# Altium PCB USB_EMMC.PcbDoc
Units mil, origin at the board's own origin, x right, y up, seen from the top; angles counter-clockwise.
Board outline 2260.62 x 862.34 mil, 2 copper layers (Top Layer, Bottom Layer); 54 components, 41 nets, 292 pads, 197 vias.
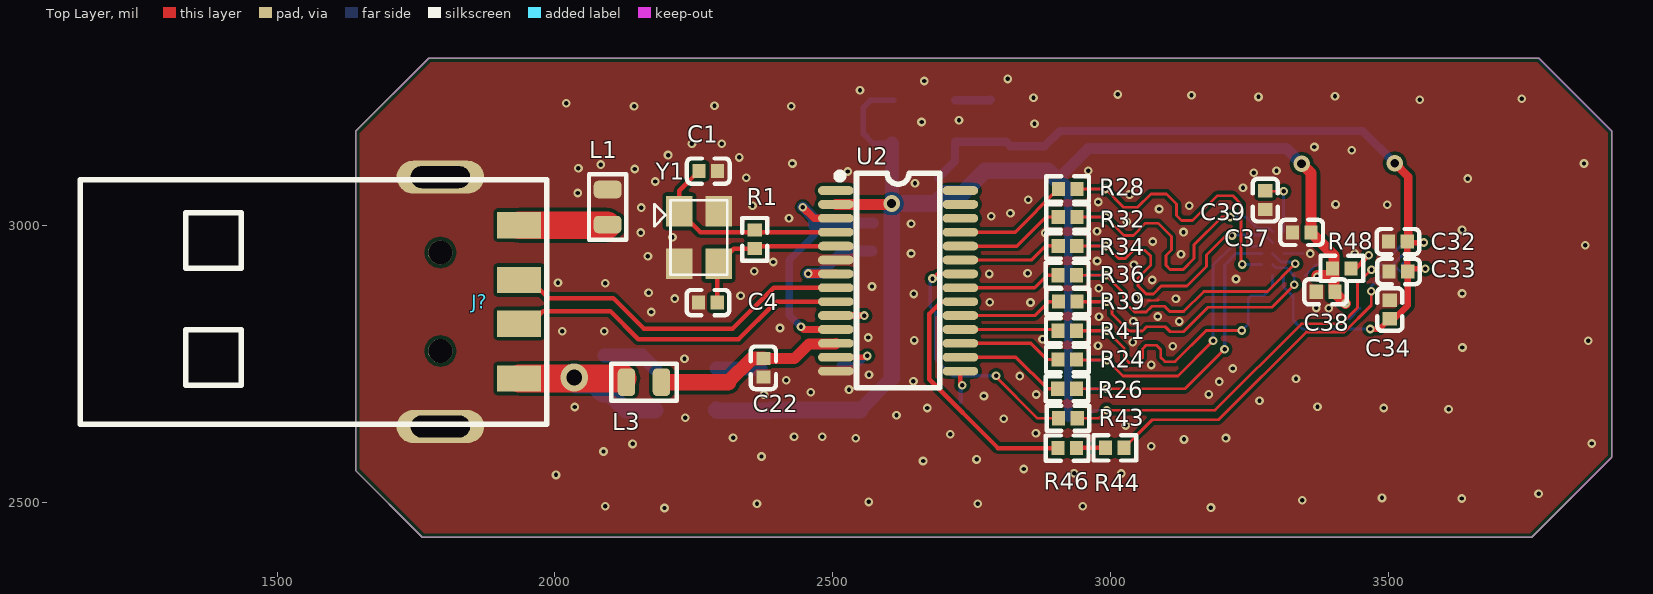
[diagram p0: Top Layer view]
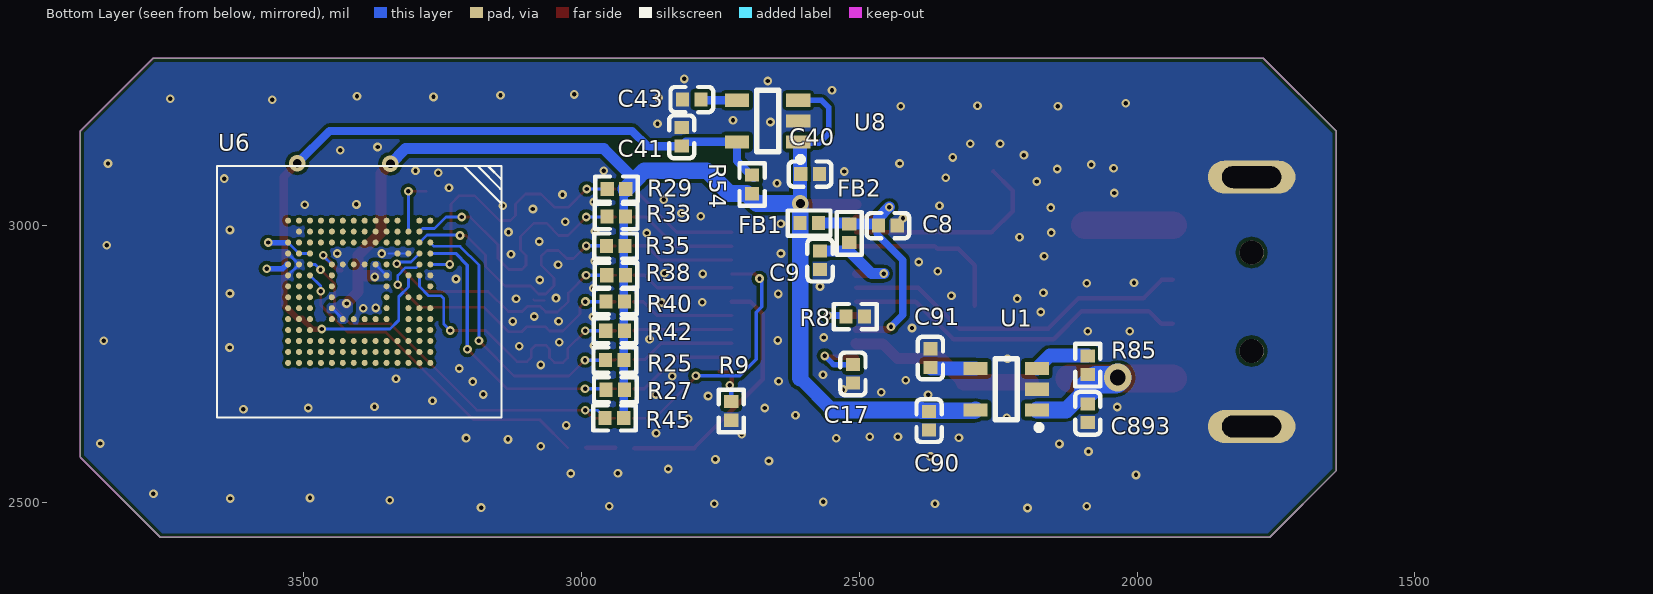
[diagram p1: Bottom Layer view, seen from below]
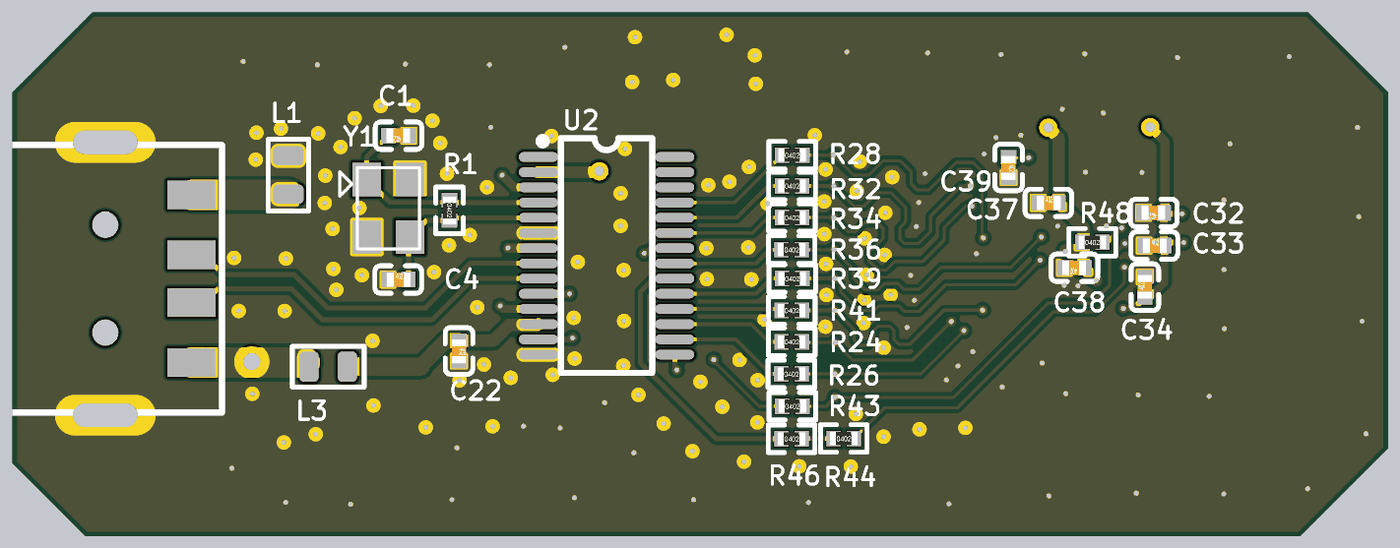
[diagram p2: 3D render of the assembled board from above, using the file's embedded part models]
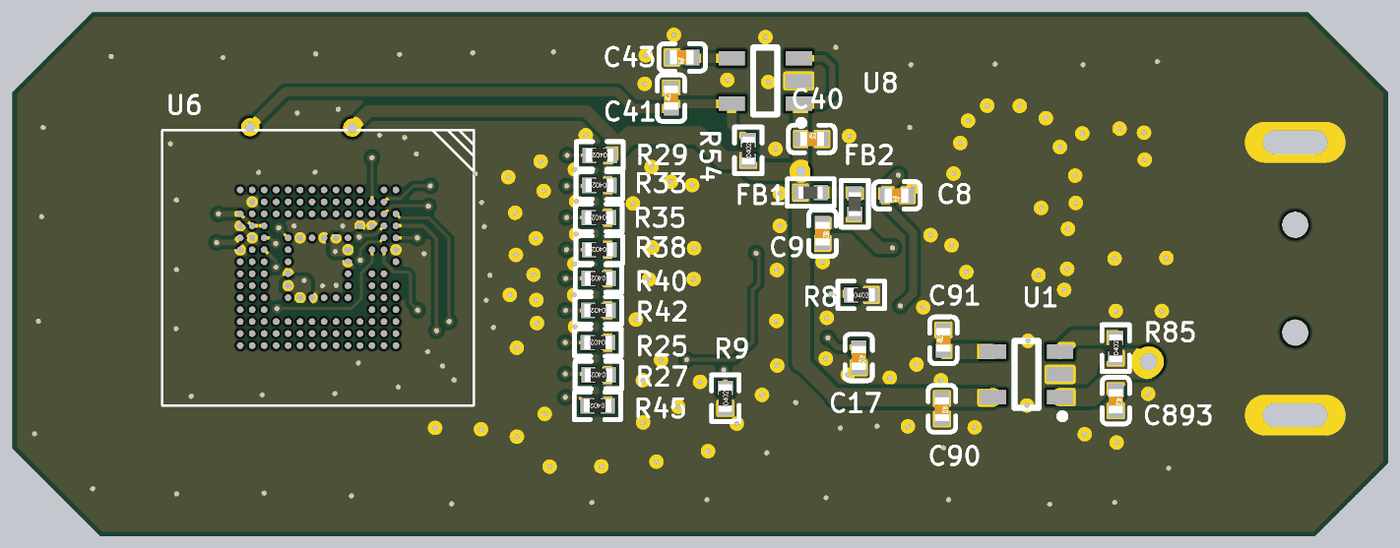
[diagram p3: 3D render of the assembled board from below, using the file's embedded part models]

## Layer stack, top to bottom
Top Solder: solder mask 0.4, Solder Resist, Dk 3.5
Top Layer: signal copper 1.4
Dielectric 1: dielectric 12.6, FR-4, Dk 4.8
Bottom Layer: signal copper 1.4
Bottom Solder: solder mask 0.4, Solder Resist, Dk 3.5

## Board outline
1761.45,2438.08 1641.33,2558.2 1641.33,3168.78 1772.97,3300.42 3770.48,3300.42 3901.95,3168.95 3901.95,2582.39 3757.64,2438.08

## Design rules (kind name [scope] priority, off if disabled: settings)
Clearance Clearance_1 [InComponent('U6')] p1: gap=5 ignorepadtopadclearanceinfootprint=FALSE
Clearance [All] p2: gap=6 ignorepadtopadclearanceinfootprint=FALSE
ComponentClearance [All] p1: gap=0 collisioncheckmode=3 verticalgap=0 showdistances=FALSE
HoleToHoleClearance [All] p1: gap=0 allowstackedmicrovias=TRUE
MinimumSolderMaskSliver [All] p1: minsoldermaskwidth=0
PlaneConnect [All] p1: planeconnectstyle=Direct reliefexpansion=20 reliefentries=4 reliefconductorwidth=10 reliefairgap=10
PolygonConnect [All] p1: connectstyle=Direct reliefconductorwidth=10 reliefentries=4 polygonreliefangle="90 Angle" airgapwidth=10
RoutingVias [All] p1: holewidth=7.87 width=15.75 viastyle="Through Hole" minholewidth=7.87 minwidth=15.75 maxholewidth=1181.1 maxwidth=1574.8
SilkToSilkClearance [All] p1: silktosilkclearance=0
SilkToSolderMaskClearance [IsPad] p1: minsilkscreentomaskgap=0 clearancetoexposedcopper=TRUE
SolderMaskExpansion [All] p1: expansion=4
Width [All] p1: maxlimit=100 minlimit=4 preferedwidth=8
24 further rules are at their usual default settings.

## Components (designator, comment, footprint, x,y, rotation, side; value= is the part's Value field where it differs from the comment)
C1 "22pF/50V" 0402_C 2275.92,3097.14 r180 top
C4 "22pF/50V" 0402_C 2275.31,2860.56 r0 top
C8 "100nF/16V" 0402_C 2448.38,2998.95 r0 bottom
C9 "4.7uF/10V" 0402_C 2570.56,2936.72 r270 bottom
C17 "100nF/50V" 0402_C 2511.25,2732.22 r270 bottom
C22 "10uF/10V" 0402_C 2375.15,2743.16 r270 top
C32 "10uF/10V" 0402_C 3516.89,2970.22 r180 top
C33 "1uF/16V" 0402_C 3517.88,2916.38 r0 top
C34 "100nF/16V" 0402_C 3502.3,2848.01 r90 top
C37 "1uF/16V" 0402_C 3343.74,2986.65 r0 top
C38 "100nF/16V" 0402_C 3386.7,2879.92 r180 top
C39 "100nF/16V" 0402_C 3278.34,3044.88 r270 top
C40 "1uF/10V" 0402_C 2588.47,3091.74 r180 bottom
C41 "1uF/10V" 0402_C 2819.48,3158.79 r90 bottom
C43 "10nF/50V" 0402_C 2801.24,3225.83 r0 bottom
C90 "1uF/10V" 0402_C 2374.4,2648.02 r270 bottom
C91 "10nF/50V" 0402_C 2371.95,2760.61 r90 bottom
C893 "1uF/10V" 0402_C 2088.68,2661.32 r270 bottom
FB1 "FB 120 Ohm" 0402_L 2590.04,3003.62 r0 bottom
FB2 "FB 120 Ohm" 0402_L 2517.74,2985.18 r270 bottom
J? "USB-A" USB-2.0-4P-18.8X12.0-H4.5-XKB 1864.74,2861.89 r270 top
L1 "100M@120R" 0805 2094.83,3032.47 r90 top
L3 "100M@120R" 0805 2160.27,2717.24 r180 top
R1 "1M/1%" 0402_R 2359.71,2974.27 r270 top
R8 "680R/1%" 0402_R 2507.13,2835.3 r180 bottom
R9 "0Ω/±1%" 0402_R 2730.35,2665.49 r90 bottom
R24 "27Ω/±1%" 0402_R 2922,2758.08 r0 top
R25 "10KΩ/±1%" 0402_R 2939.79,2756.94 r0 bottom
R26 "27Ω/±1%" 0402_R 2921.5,2705.35 r0 top
R27 "10KΩ/±1%" 0402_R 2938.87,2703.57 r0 bottom
R28 "27Ω/±1%" 0402_R 2922.71,3064.98 r0 top
R29 "10KΩ/±1%" 0402_R 2936.73,3064.77 r0 bottom
R32 "27Ω/±1%" 0402_R 2922.48,3014.49 r0 top
R33 "10KΩ/±1%" 0402_R 2937.37,3015.45 r0 bottom
R34 "27Ω/±1%" 0402_R 2922.36,2962.5 r0 top
R35 "10KΩ/±1%" 0402_R 2938.18,2962.17 r0 bottom
R36 "27Ω/±1%" 0402_R 2921.78,2909.62 r0 top
R38 "10KΩ/±1%" 0402_R 2937.54,2909.66 r0 bottom
R39 "27Ω/±1%" 0402_R 2922.83,2862.24 r0 top
R40 "10KΩ/±1%" 0402_R 2938.82,2862.25 r0 bottom
R41 "27Ω/±1%" 0402_R 2922.02,2809.67 r0 top
R42 "10KΩ/±1%" 0402_R 2939.29,2809.76 r0 bottom
R43 "27Ω/±1%" 0402_R 2923.06,2652.24 r0 top
R44 "33Ω /1%" 0402_R 3007.56,2599.07 r0 top
R45 "10KΩ/±1%" 0402_R 2940.46,2653 r0 bottom
R46 "27Ω/±1%" 0402_R 2921.76,2598.72 r0 top
R48 "10KΩ/±1%" 0402_R 3415.99,2921.85 r0 top
R54 "NC" 0402_R 2692.67,3072.99 r90 bottom
R85 "10KΩ/±1%" 0402_R 2088.95,2747.83 r90 bottom
U1 "RT9167A-33GB" SOT-23-5 2235.56,2704.59 r180 bottom
U2 "GL827L-HHY02" SSOP-28_150MIL 2617.63,2899.63 r0 top locked
U6 "THGBMHG6C1LBAIL" "IC-BGA153-SDIN8DE1-8G-C - DUPLICATE" 3399.7,2879.93 r270 bottom locked
U8 "SGM2019-1.8YN5G/TR" SOT-23-5 2664.76,3187.11 r180 bottom
Y1 "12MHZ_3225" SMD_XTAL_3225 2259.23,2977.71 r270 top

## Footprints (in the part's own frame and the unit in brackets; to place one, negate y for a bottom-side part, rotate by r counter-clockwise, add the part's x,y. Pads: shape width x height; smd on the part's side, far side on the other; paste and mask are expansions set on the pad)
0402_C [mm]
  rect 0.6x0.65 smd mask+0.051: 1(-0.425,0) 2(0.425,0)
  silkscreen extent -0.97,-0.58 0.97,0.58, body extent -0.48,-0.3 0.52,0.3, height 0.2
0402_L [mm]
  rect 0.6x0.65 smd mask+0.051: 1(-0.425,0) 2(0.425,0)
  silkscreen extent -0.97,-0.58 0.97,0.58, body extent -0.49,-0.26 0.52,0.26, height 0.36
0402_R [mm]
  rect 0.6x0.65 smd mask+0.051: 1(-0.425,0) 2(0.425,0)
  silkscreen extent -0.97,-0.58 0.97,0.58, body extent -0.57,-0.27 0.58,0.28, height 0.41
0805 [mm]
  rrect50% 0.8x1.27 smd: 1(-0.8,0) 2(0.8,0)
  silkscreen extent -1.5,-0.85 1.5,0.85
"IC-BGA153-SDIN8DE1-8G-C - DUPLICATE" [mm]
  round 0.275 smd: AA1(-3.25,-3.25) AA3(-2.25,-3.25) AA4(-1.75,-3.25) AA5(-1.25,-3.25) AA6(-0.75,-3.25) AA7(-0.25,-3.25) AA8(0.25,-3.25) AA9(0.75,-3.25) AA10(1.25,-3.25) AA11(1.75,-3.25) AA12(2.25,-3.25) AA13(2.75,-3.25) AA14(3.25,-3.25) H1(-3.25,3.25) H3(-2.25,3.25) H4(-1.75,3.25) H5(-1.25,3.25) H6(-0.75,3.25) H7(-0.25,3.25) H9(0.75,3.25) H10(1.25,3.25) H11(1.75,3.25) H12(2.25,3.25) H13(2.75,3.25) H14(3.25,3.25) J1(-3.25,2.75) J2(-2.75,2.75) J3(-2.25,2.75) J4(-1.75,2.75) J5(-1.25,2.75) J6(-0.75,2.75) J8(0.25,2.75) J9(0.75,2.75) J10(1.25,2.75) J11(1.75,2.75) J12(2.25,2.75) J13(2.75,2.75) J14(3.25,2.75) K2(-2.75,2.25) K3(-2.25,2.25) K4(-1.75,2.25) K6(-0.75,2.25) K8(0.25,2.25) K9(0.75,2.25) K10(1.25,2.25) K11(1.75,2.25) K12(2.25,2.25) K13(2.75,2.25) K14(3.25,2.25) L1(-3.25,1.75) L2(-2.75,1.75) L3(-2.25,1.75) L4(-1.75,1.75) L12(2.25,1.75) L13(2.75,1.75) L14(3.25,1.75) M1(-3.25,1.25) M2(-2.75,1.25) M3(-2.25,1.25) M5(-1.25,1.25) M6(-0.75,1.25) M7(-0.25,1.25) M8(0.25,1.25) M9(0.75,1.25) M10(1.25,1.25) M12(2.25,1.25) M13(2.75,1.25) M14(3.25,1.25) N1(-3.25,0.75) N2(-2.75,0.75) N3(-2.25,0.75) N5(-1.25,0.75) N10(1.25,0.75) N12(2.25,0.75) N13(2.75,0.75) N14(3.25,0.75) P1(-3.25,0.25) P2(-2.75,0.25) P3(-2.25,0.25) P5(-1.25,0.25) P10(1.25,0.25) P12(2.25,0.25) P13(2.75,0.25) P14(3.25,0.25) R1(-3.25,-0.25) R2(-2.75,-0.25) R3(-2.25,-0.25) R5(-1.25,-0.25) R10(1.25,-0.25) R12(2.25,-0.25) R13(2.75,-0.25) R14(3.25,-0.25) T1(-3.25,-0.75) T2(-2.75,-0.75) T3(-2.25,-0.75) T5(-1.25,-0.75) T10(1.25,-0.75) T12(2.25,-0.75) T13(2.75,-0.75) T14(3.25,-0.75) U1(-3.25,-1.25) U2(-2.75,-1.25) U3(-2.25,-1.25) U5(-1.25,-1.25) U6(-0.75,-1.25) U7(-0.25,-1.25) U8(0.25,-1.25) U9(0.75,-1.25) U10(1.25,-1.25) U12(2.25,-1.25) U13(2.75,-1.25) U14(3.25,-1.25) V1(-3.25,-1.75) V2(-2.75,-1.75) V3(-2.25,-1.75) V12(2.25,-1.75) V13(2.75,-1.75) V14(3.25,-1.75) W1(-3.25,-2.25) W2(-2.75,-2.25) W3(-2.25,-2.25) W4(-1.75,-2.25) W5(-1.25,-2.25) W6(-0.75,-2.25) W7(-0.25,-2.25) W8(0.25,-2.25) W9(0.75,-2.25) W10(1.25,-2.25) W11(1.75,-2.25) W12(2.25,-2.25) W13(2.75,-2.25) W14(3.25,-2.25) Y1(-3.25,-2.75) Y2(-2.75,-2.75) Y3(-2.25,-2.75) Y4(-1.75,-2.75) Y5(-1.25,-2.75) Y6(-0.75,-2.75) Y7(-0.25,-2.75) Y8(0.25,-2.75) Y9(0.75,-2.75) Y10(1.25,-2.75) Y11(1.75,-2.75) Y12(2.25,-2.75) Y13(2.75,-2.75) Y14(3.25,-2.75)
  silkscreen extent -5.75,-6.5 5.75,6.5
SMD_XTAL_3225 [mm]
  rect 1.4x1.2 smd: 1(-1.2,-0.9) 2(1.2,-0.9) 3(1.2,0.9) 4(-1.2,0.9)
  silkscreen extent -1.7,-2.03 1.7,1.3
SOT-23-5 [mm]
  rect 1.1x0.6 smd: 1(1.4,-0.95) 2(1.4,0) 3(1.4,0.95) 4(-1.4,0.95) 5(-1.4,-0.95)
  silkscreen extent -0.5,-1.87 1.62,1.4
SSOP-28_150MIL [mil]
  oval 64.17x15.75 smd: 1(-112,162.5) 2(-112,137.5) 3(-112,112.5) 4(-112,87.5) 5(-112,62.5) 6(-112,37.5) 7(-112,12.5) 8(-112,-12.5) 9(-112,-37.5) 10(-112,-62.5) 11(-112,-87.5) 12(-112,-112.5) 13(-112,-137.5) 14(-112,-162.5) 15(112,-162.5) 16(112,-137.5) 17(112,-112.5) 18(112,-87.5) 19(112,-62.5) 20(112,-37.5) 21(112,-12.5) 22(112,12.5) 23(112,37.5) 24(112,62.5) 25(112,87.5) 26(112,112.5) 27(112,137.5) 28(112,162.5)
  silkscreen extent -111,-192 75,194
USB-2.0-4P-18.8X12.0-H4.5-XKB [mm]
  rect 1.2x2 smd: 1(3.5,1.8) 2(1,1.8) 3(-1,1.8) 4(-3.5,1.8)
  oval 1.5x4 hole 1 slot 2.7 at 90 deg: 5(-5.7,-1.8) 6(5.7,-1.8)
  round 1.1 hole 1.1 unplated: ""(-2.25,-1.8) ""(2.25,-1.8)
  silkscreen extent -5.59,-18.27 5.59,3.07

## Part data
C1 C4: library part C2, "22pF/50V;0402"
C8 C34 C38 C39: library part CAP, "100nF±10%/16V，X7R，MLCC，-55°C ~ 125°C，0402", 参考链接=https://item.szlcsc.com/78132.html
C9: library part CAP, "4.7uF±20%/10V，X5R，0402", 参考链接=https://item.szlcsc.com/313626.html
C17: library part CAP, "100nF/50V;X7R;0402;"
C22: library part CAP, "10uF/10V;X5R;0402;"
C32: library part C2, "10uF/10V;0402"
C33 C37: library part CAP, "1uF±10%/10V，X5R，0402", 参考链接=https://item.szlcsc.com/78133.html
C40 C41: library part CAP, "1uF/10V;X5R;10%;0402;"
C43 C91: library part CAP, "10nF/50V;X7R;0402;"
C90 C893: library part CAP, "1uF/10V;X5R;0402;"
FB1 FB2: library part INDUCTOR1, "FB120 Ohm/1%;0402;"
J?: library part CON6, "Connector", Part_Field_Name_1="Part Field 1", Part_Field_Name_2="Part Field 2", Part_Field_Name_3="Part Field 3", Part_Field_Name_4="Part Field 4", Part_Field_Name_5="Part Field 5", Part_Field_Name_6="Part Field 6", Part_Field_Name_7="Part Field 7", Part_Field_Name_8="Part Field 8", Part_Field_Name_9="Part Field 9", Part_Field_Name_10="Part Field 10", Part_Field_Name_11="Part Field 11", Part_Field_Name_12="Part Field 12", Part_Field_Name_13="Part Field 13", Part_Field_Name_14="Part Field 14"
L1 L3: library part L, Part_Field_Name_1="Part Field 1", Part_Field_Name_2="Part Field 2", Part_Field_Name_3="Part Field 3", Part_Field_Name_4="Part Field 4", Part_Field_Name_5="Part Field 5", Part_Field_Name_6="Part Field 6", Part_Field_Name_7="Part Field 7", Part_Field_Name_8="Part Field 8", Part_Field_Name_9="Part Field 9", Part_Field_Name_10="Part Field 10", Part_Field_Name_11="Part Field 11", Part_Field_Name_12="Part Field 12", Part_Field_Name_13="Part Field 13", Part_Field_Name_14="Part Field 14", Part_Field_Name_15="Part Field 15"
R1: library part R, "1M/1%;0402"
R8: library part RES1, "680R/1%;0402;"
R9 R24 R26 R28 R32 R34 R36 R39 R41 R43 R46: library part "0603 27Ω (27R0) 1%", "贴片电阻", Package=0603, SuppliersPartNumber=C25190, ComponentLink1Description=供应商链接, ComponentLink1URL=http://www.szlcsc.com/product/details_25933.html, Supplier=LC
R25 R27 R29 R33 R35 R38 R40 R42 R45 R48 R85: library part "0402 10KΩ (1002) 1%", "贴片电阻", Package=0402, SuppliersPartNumber=C25744, ComponentLink1Description=供应商链接, ComponentLink1URL=http://www.szlcsc.com/product/details_26487.html, Supplier=LC
R44 R54: library part "0402 33Ω (33R0) 1%", "贴片电阻", Package=0402, SuppliersPartNumber=C25105, ComponentLink1Description=供应商链接, ComponentLink1URL=http://www.szlcsc.com/product/details_25848.html, Supplier=LC
U1: library part RT9167, "RT9167A-33GB;SOT23-5;RICHTEK; LDO"
U2: BOM_Manufacturer="Genesys Logic", BOM_Manufacturer Part=GL827L-HHY02, BOM_Supplier=LCSC, BOM_Supplier Part=C161839, Contributor=LCSC, spicePre=U
U6: library part KLMAG4FE4B-B002_0, "KLM8G2FEJA-A002", PCB DECAL=IC-BGA169-SDIN8DE1-8G-C, Source_Path=Z:\003_NXP4330\002_HW\002_REFERENCE_BOARD\001_SCHEMATIC\001_DEVELOP\NXP4330_TABLET_REF_VER090_130401-1.DSN
U8: library part XC6219B182MR, "XC6219B182MR;SOT23-5;TOREX;"
Y1: "XTAL;12MHZ_3225;Crystals"

## Via types
v1: diameter 15.75, hole 7.87, Top Layer to Bottom Layer, tented both sides, 97 vias
v2: diameter 15.75, hole 7.87, Top Layer to Bottom Layer, 96 vias
v3: diameter 30, hole 16, Top Layer to Bottom Layer, 3 vias
v4: diameter 50, hole 28, Top Layer to Bottom Layer, 1 vias

## Nets (pads, with @x,y where several pads share a name; then routed paths per layer and width w, separated by ;. In a path a pad name is that pad's centre, name@x,y a point inside that pad or via, vN(x,y) a via of type N, cw(c..) or ccw(c..) an arc to the next point about the centre after c; other vN are vias at no path point)
D0: R24.1 U2.17 | length 187.7
  Top Layer w6: U2.17 2855.92,2787.13 2884.97,2758.08 R24.1
D1: R26.1 U2.16 | length 198.7
  Top Layer w6: U2.16 2829.65,2762.13 2886.43,2705.35 R26.1
D2: R28.1 U2.25 | length 208.6
  Top Layer w6: U2.25 2828.13,2987.13 R28.1
D3: R32.1 U2.24 | length 197.8
  Top Layer w6: U2.24 2831.45,2962.13 2883.81,3014.49 R32.1
D4: R34.1 U2.23 | length 186.5
  Top Layer w6: U2.23 2857.73,2937.13 2883.1,2962.5 R34.1
D5: R36.1 U2.21 | length 184.7
  Top Layer w6: U2.21 2863.05,2887.13 2885.54,2909.62 R36.1
D6: R39.1 U2.19 | length 186.9
  Top Layer w6: U2.19 2863.13,2837.13 2888.24,2862.24 R39.1
D7: R41.1 U2.18 | length 176.7
  Top Layer w6: U2.18 2902.83,2812.13 R41.1
DATA0: R24.2 R25.2 U6.H3 | length 561.5
  Top Layer w5: R24.2 2939.89,2756.93 v1(2993.37,2756.93) 3021.99,2728.31 3120.89,2728.31 v1(3184.33,2791.75)
  Bottom Layer w5: v1(3184.33,2791.75) 3184.33,2927.92 3218.11,2961.7 3264.93,2961.7 U6.H3
  Bottom Layer w6: R25.2 v1(2993.37,2756.93)
DATA1: R26.2 R27.2 U6.H4 | length 561.4
  Top Layer w5: R26.2 3133.93,2705.35 v1(3205.06,2776.48)
  Bottom Layer w6: R27.2 2957.39,2705.35 v1@2993.31,2705.35 ; v1(3205.06,2776.48) 3205.06,2927.68 3226.21,2948.83 U6.H4
  other v1: 2993.31,2705.34
DATA2: R28.2 R29.2 U6.H5 | length 557
  Top Layer w5: R28.2 v1(2990.48,3064.97) ; v1(2990.48,3064.97) 3023.42,3032.03 3048.43,3032.03 3072.39,3055.99 3100.15,3055.99 3118.31,3037.83 3118.31,3017.53 3127.76,3008.08 3147.25,3008.08 3192.01,3052.84 3219.75,3052.84 3234.62,3037.97 3234.62,2931.28 v1(3236.77,2929.14)
  Bottom Layer w5: v1(3236.77,2929.14) U6.H5
  Bottom Layer w6: R29.2 2953.68,3064.98 v1(2990.48,3064.97)
DATA3: R32.2 R33.2 U6.J2 | length 556.3
  Top Layer w5: v1(2991.02,3014.49) 3024.31,2981.2 3040.78,2981.2 3063.01,3003.43 3085.32,3003.43 3109.44,2979.31 3109.44,2955.31 3099.38,2945.25 3099.38,2927.57 3106.95,2920 3130.57,2920 3150.21,2939.64 3150.21,2964.64 3200.06,3014.49 v1(3215.26,3014.49)
  Top Layer w6: R32.2 v1(2991.02,3014.49)
  Bottom Layer w5: v1(3215.26,3014.49) 3243.6,3014.49 3264.3,2993.79 3285.84,2993.79 U6.J2
  Bottom Layer w6: R33.2 2955.06,3014.49 v1(2991.02,3014.49)
DATA4: R34.2 R35.2 U6.J3 | length 562.2
  Top Layer w5: R34.2 v1(2991.17,2962.49) 3014.08,2939.58 3026.36,2939.58 3041.02,2954.24 3061.91,2954.24 3072.31,2943.84 3072.31,2928.04 3049.11,2904.84 3049.11,2890.86 3064.04,2875.93 3076.8,2875.93 3091.13,2890.26 3137.24,2890.26 3172.59,2925.61 3172.59,2946.03 3207.77,2981.21 v1(3218.25,2981.21)
  Bottom Layer w5: v1(3218.25,2981.21) 3219.26,2982.22 3277.72,2982.22 U6.J3
  Bottom Layer w6: R35.2 2955.25,2962.5 v1(2991.17,2962.49)
DATA5: R36.2 R38.2 U6.J4 | length 562.7
  Top Layer w5: R36.2 v1(2991.45,2909.61) 3023.41,2877.65 3023.41,2862.73 3042.68,2843.46 3063.91,2843.46 3074.33,2853.88 3096.91,2853.88 3106.42,2844.37 3131.41,2844.37 3167.65,2880.61 3282.27,2880.61 v1(3332.2,2930.54)
  Bottom Layer w5: U6.J4 3306.76,2933.5 3329.24,2933.5 v1(3332.2,2930.54) ; v1@3332.2,2933.5 v1@3335.64,2933.5
  Bottom Layer w6: R38.2@2954.31,2909.62 v1(2991.45,2909.61)
DATA6: R39.2 R40.2 U6.J5 | length 562.8
  Top Layer w5: v1(2992.69,2862.23) 3002.29,2852.63 3002.29,2840.24 3032.93,2809.6 3057.2,2809.6 3064.64,2817.04 3098.22,2817.04 3107.31,2807.95 3130.77,2807.95 3174.77,2851.95 3289.83,2851.95 v1(3330.26,2892.38)
  Top Layer w6: R39.2 v1(2992.69,2862.23)
  Bottom Layer w4.5: U6.J5 3297.82,2922.75 3316.99,2922.75 3330.26,2909.48 v1(3330.26,2892.38)
  Bottom Layer w6: R40.2 v1(2992.69,2862.23)
DATA7: R41.2 R42.2 U6.J6 | length 569.3
  Top Layer w5: v1(2992.86,2809.66) 3024.59,2777.93 3024.59,2760.8 3033.04,2752.35 3048.17,2752.35 3057.14,2761.32 3057.14,2777.01 3063.93,2783.8 3082.65,2783.8 3090.18,2776.27 3090.18,2761.9 3097.95,2754.13 3115.93,2754.13 3171.97,2810.17 v1(3235.96,2810.17)
  Top Layer w6: R41.2 v1(2992.86,2809.66)
  Bottom Layer w5: v1(3235.96,2810.17) 3247.63,2821.84 3247.63,2867.78 3252.63,2872.78 3274.86,2872.78 3291.43,2889.35 U6.J6
  Bottom Layer w6: R42.2 2956.11,2809.67 v1(2992.86,2809.66)
EMMC_CLK: R44.1 R46.2 | length 52
  Top Layer w8: R46.2@2938.84,2599.07 R44.1
EMMC_CMD: R43.2 R45.2 U6.W5 | length 716.6
  Top Layer w5: R43.2 2978.54,2652.24 v1(2993.15,2666.84) 3187.68,2666.85 3343.08,2822.25 3415.36,2822.25 3444.22,2851.11 3444.22,2894.61 v1(3469.29,2919.68)
  Bottom Layer w5: R45.2@2966.83,2662.97 2970.7,2666.84 v1(2993.15,2666.84) ; v1(3469.29,2919.68) 3478.75,2929.14 U6.W5
EMMC_PWREN: R48.2 U6.U5 | length 65.6
  Top Layer w8: R48.2@3431.78,2918.86 3437.69,2918.86 v1(3464.36,2945.53)
  Bottom Layer w5: U6.U5 3464.36,2944.59 v1@3464.36,2944.69
GND: C1.1 C4.1 C8.1 C9.2 C17.2 C22.2 C32.2 C33.1 C34.2 C37.1 C38.2 C39.2 C40.2 C41.2 C43.2 C90.2 C91.2 C893.2 J?.5 J?.6 L1.2 R8.2 R9.1 U1.2 U2.6 U2.14 U6.AA4 U6.AA6 U6.H6 U6.K4 U6.L4 U6.M7 U6.P5 U6.R10 U6.T5 U6.U8 U6.Y2 U6.Y5 U8.2 Y1.2 Y1.4 | length 111.3
  Top Layer w4: 3066.85,2864.17 3067.06,2864.38 3084.56,2864.38 3086.2,2866.02
  Bottom Layer w4: U6.K4 U6.L4 3346.64,2948.83 ; U6.AA6 U6.Y5 U6.AA4
  other v1: 2197.12,2490.94 3180.36,2491.61 2090.49,2494.2 2949.75,2494.1 2363.59,2498.56 2760.73,2498.56 2564.88,2501.82 3344.66,2504.67 3631.9,2507.93 3488.28,2509.03 3770.08,2516.64 2002.01,2550.37 2662.45,2575.39 2371.84,2583.61 3865.83,2606.96 2541.38,2616.28 2481.11,2619.1 2614.6,2657.96 3608.11,2668.49 3491.49,2670.7 3372.1,2672.91 3267.92,2683.79 3176.31,2695.29 3195.29,2718.36 3333.5,2723.35 3219.59,2741.97 3632.98,2779.58 3111.62,2782.02 3859.3,2791.91 3123.43,2826.6 3392.27,2850.27 3369.95,2850.88 3117.37,2867.55 3632.43,2876.86 3225.47,2902.95 3126.59,2947.52 3359.22,2948.66 3439.25,2948.74 3853.87,2963.83 3131,2987.3 3632.43,2991.27 3141.2,3034.63 3404.71,3037.15 3497.56,3036.59 3238.23,3067.07 3642.38,3083.58 3257.53,3094.2 3298.49,3097.86 2427.36,3110.7 3851.69,3110.72 3434,3134.42 3366.57,3140.5 2142.53,3213.79 2425.23,3213.79 2287.07,3214.85 2020.32,3219.11 3556.15,3225.63 3739.62,3227.14 3265.98,3230.59 3403.6,3231.7 3145.49,3233.36 3012.84,3235.02 2548.98,3242.4
  other v2: 2934.25,2553.29 3019.03,2552.9 2843.61,2561.11 2758.82,2578.31 2087.4,2592.62 3072.95,2602.13 2139.78,2606.14 3131.95,2614.25 2320.59,2617.41 3207.36,2616.59 2430.42,2619.1 2711.54,2623.62 2865.51,2625.5 3027.25,2639.49 2807.8,2651.29 2234.65,2653.43 2670.13,2670.9 2035.58,2672.6 2771.96,2692.38 2376.05,2694.83 2865.94,2695 2460.19,2698.96 2529.24,2703.88 2645.12,2719.08 2416.2,2720.78 2836.22,2728.23 2565.25,2730.51 3073.16,2748.35 2233.15,2759.62 2977.26,2783 3039.93,2788.99 2646.42,2792.41 2877.35,2794.7 2563.69,2797.59 2013.19,2808.86 2088.65,2808.85 2405.12,2814.77 3040.97,2826.88 2979,2835.17 3084.52,2835.34 2173.51,2843.63 2782.46,2861.3 2855.74,2860.74 2215.62,2867.68 3045.61,2868.56 2334.17,2872.84 2645.76,2876.1 2168.61,2877.99 2978.36,2886.25 2570.49,2889.41 2090.74,2895.1 2005.54,2896.14 3074.63,2901.09 2781.69,2912.09 2850.59,2913.34 2358.74,2916.76 3041.84,2928.36 2393.03,2933.54 2975.63,2935.25 2167.37,2943.98 2640.9,2948.78 3075.74,2970.36 2211.5,2978.21 2154.58,2986.46 2882.18,2985.6 2975.42,2988.88 2640.9,3002.31 3028.95,3006.1 2421.26,3012.36 2784.92,3015.82 2819.6,3021.36 3087.16,3028.94 2155.41,3031.43 2355.45,3034.72 2977.68,3041.55 2851.69,3045.7 3033.98,3054.75 2041.15,3057.61 2647.98,3075.39 2180.57,3078.44 2344.31,3085.04 2527,3096.46 2959.86,3097.81 2143.77,3100.92 2042.32,3102.1 2082.51,3108.73 2331.52,3121.74 2203.67,3125.87 2246.56,3146.08 2300.17,3146.49 2862.95,3182.45 2659.78,3185.4 2727.22,3188.77 2861.27,3229.24 2664.42,3259.17 2814.9,3262.96
HUB_DM3: J?.2 U2.9 | length 628.5
  Top Layer w8: J?.2 1956.32,2822.51 1978.99,2845.19 2099.43,2845.19 2150.18,2794.44 2330.47,2794.44 2398.16,2862.13 U2.9
HUB_DP3: J?.3 U2.8 | length 636.7
  Top Layer w8: J?.3 1955.51,2901.26 1988.08,2868.68 2104.73,2868.68 2159.65,2813.76 2320.25,2813.76 2393.62,2887.13 U2.8
NetC17_1: C17.1 U2.13 | length 110.9
  Top Layer w10: U2.13 v1@2559.45,2762.13
  Bottom Layer w10: C17.1 2546.26,2748.95 v1(2561.88,2764.56)
NetC39_1: C39.1 U6.K2 | length 104.7
  Top Layer w5: C39.1@3279.19,3060.76 v1(3311.22,3060.76)
  Bottom Layer w5: U6.K2 3311.12,3060.67 v1(3311.22,3060.76)
NetC43_1: C43.1 U8.4 | length 65.2
  Bottom Layer w15: U8.4 2783.2,3224.51 C43.1
NetC91_1: C91.1 U1.4 | length 79.4
  Bottom Layer w25: U1.4 C91.1@2370.06,2741.99
NetJ?_4: J?.4 L1.1 | length 157.9
  Top Layer w50: J?.4 L1.1@2093.54,2999.68
NetR8_1: R8.1 U2.10 | length 83.2
  Top Layer w13: U2.10 v1@2557.71,2837.13
  Bottom Layer w13: R8.1@2525.65,2837.09 v1(2556.77,2837.09)
NetR44_2: R44.2 U6.W6 | length 612.7
  Top Layer w5: R44.2 3074.88,2649.66 3194.21,2649.66 3352.09,2807.54 3420.71,2807.54 3468.86,2855.69 v1(3468.86,2880.92)
  Bottom Layer w5: v1(3468.86,2880.92) 3468.86,2890.03 U6.W6
NetR85_2: R85.2 U1.3 | length 101.1
  Bottom Layer w25: R85.2@2088.95,2765.26 2157.18,2765.26 U1.3
SD_CDZ: R9.2 U2.15 | length 71.3
  Top Layer w8: v1@2729.63,2715.18 U2.15 U2.15@2751.03,2737.13
  Bottom Layer w8: R9.2 v1@2730.35,2709.28 ; v1(2732.94,2711.87) v1@2732.94,2712.81
SD_CLK: R46.1 U2.20 | length 465.7
  Top Layer w8: U2.20 2695.6,2862.13 2673.5,2840.03 2673.5,2722.34 2797.12,2598.72 R46.1
SD_CMD: R43.1 U2.22 | length 469.9
  Top Layer w5: 2687.98,2912.13 U2.22 ; v1@2793.22,2727.53 2868.51,2652.24 R43.1
  Top Layer w6: v1(2679.52,2903.67) 2687.98,2912.13
  Bottom Layer w6: v1(2679.52,2903.67) 2675.32,2899.47 2675.32,2853.14 2685.47,2842.99 2685.47,2758.25 2714.94,2728.78 v1(2793.85,2728.77)
USB_5V: C22.1 L3.1 U2.12 | length 342.8
  Top Layer w20: C22.1 2431.43,2759.89 2457.54,2786 2504.5,2786 U2.12
  Top Layer w25: 2311.66,2717.24 2354.31,2759.89 C22.1
  Top Layer w30: L3.1 2311.66,2717.24
USB_AVDD: C9.1 FB2.2 U2.7 | length 181.7
  Top Layer w15: v1@2455.7,2912.13 U2.7
  Bottom Layer w20: v1(2455.7,2912.6) 2477.96,2912.6 2518.81,2953.45 C9.1
USB_DVDD: C8.2 FB1.1 FB2.1 U2.3 U2.11 | length 490.6
  Top Layer w13: v1(2442.79,2817.11) 2447.77,2812.13 U2.11 ; v1@2445.72,3032.19 v1(2446,3032.18) 2466.06,3012.13 U2.3
  Bottom Layer w13: v1(2442.79,2817.11) 2421.61,2838.3 2421.61,2937.2 2468.07,2983.66 C8.2@2468.07,3001.91
  Bottom Layer w20: v1(2446,3032.18) 2465.11,3013.07 C8.2 ; C8.2@2468.07,3001.91 FB2.1 ; FB2.1@2519.45,3003.62 FB1.1
VCC+3.3V: C37.2 C38.1 C40.1 C90.1 FB1.2 R25.1 R27.1 R29.1 R33.1 R35.1 R38.1 R40.1 R42.1 R45.1 R48.1 R54.1 U1.5 U2.2 U6.M6 U6.N5 U6.T10 U6.U9 U8.1 U8.3 | length 3210.4
  Top Layer w20: U2.2 v3@2604.36,3037.13 ; v3(3343.69,3110.27) 3360.47,3093.49 C37.2 3401.59,2945.54 3401.59,2905.09 ; v1@3371.63,2908.71 3397.97,2908.71 3401.59,2905.09 ; v1(3422.44,2858.89) 3401.59,2879.74 3401.59,2905.09
  Bottom Layer w5: U6.M6 U6.N5 ; U6.T10 U6.U9
  Bottom Layer w10: U8.1@2606.77,3146.84 2572.52,3146.84 2554.85,3164.51 2554.85,3211.65 2567.71,3224.51 U8.3
  Bottom Layer w15: R29.1 2923.73,3061.04 R45.1
  Bottom Layer w20: 2903.51,3081.26 2959.7,3137.45 3316.51,3137.45 v3(3343.69,3110.27)
  Bottom Layer w25: U1.5 C90.1@2371.96,2667.19 ; C90.1 2546.38,2664.75 2548.82,2667.19 2606.12,2724.49 2606.77,2725.14 FB1.2 2606.77,3038.66 U8.1@2606.77,3146.84
  Bottom Layer w30: U1.5 2291.91,2665.96 2388.01,2665.96 2389.24,2667.19 2548.82,2667.19 ; 2606.12,2724.49 2606.12,3038.43 v3(2605.89,3038.66) 2606.77,3038.66 2684.54,3038.66 2702.73,3056.85 2733.44,3056.85 2774.26,3097.67 2887.1,3097.67 2903.51,3081.26 R29.1
  other v1: 3371.63,2906.67
VCC+5V: C893.1 J?.1 L3.2 R85.1 U1.1 | length 356.3
  Top Layer w50: J?.1 L3.2@2121.92,2724.09
  Bottom Layer w30: 2088.68,2706.02 2127.51,2667.19 U1.1
  Bottom Layer w50: v4(2034.7,2725.67) 2038.62,2721.76 2072.95,2721.76 2088.68,2706.02
VCC_FLASH: C32.1 C33.2 C34.1 C41.1 R54.2 U6.AA3 U6.AA5 U6.K6 U6.W4 U6.Y4 U8.5 | length 1683.6
  Top Layer w10: v1(3467.13,2812.84) 3483.86,2812.84 C34.1 ; C32.1 3535.33,2968.5 v1(3563.49,2968.5) ; C33.2 3539.64,2921.41 v1(3566.18,2921.41)
  Top Layer w12: C34.1 3510.41,2831.28 3534.61,2855.49 C33.2 3533.62,2917.38 C32.1
  Top Layer w15: v3(3511.19,3111.25) 3535.33,3087.11 C32.1@3535.33,2968.5
  Bottom Layer w5: U6.K6 3311.12,2888.35 3328.57,2870.89 3328.57,2828.77 3344.49,2812.85 v1(3467.13,2812.84) ; U6.Y4 U6.AA3
  Bottom Layer w6: U6.W4 U6.Y4
  Bottom Layer w10: U6.AA5 3529.77,2929.14 3537.49,2921.42 v1(3566.18,2921.41) ; U6.AA3 v1(3563.49,2968.5) v1@3563.56,2968.44
  Bottom Layer w15: R54.2@2689.47,3085.09 R54.2@2690.66,3085.09 ; R54.2@2690.66,3085.93 2719.88,3115.14 U8.5 2811.83,3149.71 C41.1 2881.32,3142.06 2908.46,3169.2 3453.25,3169.2 3511.19,3111.26 v3@3512.45,3111.26
X1: C1.2 R1.1 U2.4 Y1.1 | length 387.3
  Top Layer w8: C1.2 2223.8,3061.75 Y1.1 2261.36,2987.4 2356.1,2987.4 R1.1 2363.58,2987.13 U2.4
X2: C4.2 R1.2 U2.5 Y1.3 | length 300.6
  Top Layer w8: C4.2@2292.04,2855 2292.04,2927.85 Y1.3 2321.73,2957.54 R1.2 2364.3,2962.13 U2.5
pads on no net: J?. U2.1 U2.26 U2.27 U2.28 U6.AA1 U6.AA7 U6.AA8 U6.AA9 U6.AA10 U6.AA11 U6.AA12 U6.AA13 U6.AA14 U6.H1 U6.H7 U6.H9 U6.H10 U6.H11 U6.H12 U6.H13 U6.H14 U6.J1 U6.J8 U6.J9 U6.J10 U6.J11 U6.J12 U6.J13 U6.J14 U6.K3 U6.K8 U6.K9 U6.K10 U6.K11 U6.K12 U6.K13 U6.K14 U6.L1 U6.L2 U6.L3 U6.L12 U6.L13 U6.L14 U6.M1 U6.M2 U6.M3 U6.M5 U6.M8 U6.M9 U6.M10 U6.M12 U6.M13 U6.M14 U6.N1 U6.N2 U6.N3 U6.N10 U6.N12 U6.N13 U6.N14 U6.P1 U6.P2 U6.P3 U6.P10 U6.P12 U6.P13 U6.P14 U6.R1 U6.R2 U6.R3 U6.R5 U6.R12 U6.R13 U6.R14 U6.T1 U6.T2 U6.T3 U6.T12 U6.T13 U6.T14 U6.U1 U6.U2 U6.U3 U6.U6 U6.U7 U6.U10 U6.U12 U6.U13 U6.U14 U6.V1 U6.V2 U6.V3 U6.V12 U6.V13 U6.V14 U6.W1 U6.W2 U6.W3 U6.W7 U6.W8 U6.W9 U6.W10 U6.W11 U6.W12 U6.W13 U6.W14 U6.Y1 U6.Y3 U6.Y6 U6.Y7 U6.Y8 U6.Y9 U6.Y10 U6.Y11 U6.Y12 U6.Y13 U6.Y14

## Polygon pours and split planes (outlines as drawn)
VCC+3.3V on Bottom Layer "Top Layer-No Net" (solid, pour order 2): 3411.25,2859.33 3411.29,2843.74 3419.77,2835.26 3419.77,2825.84 3423.53,2822.08 3434,2822.08 3439.18,2827.26 3439.18,2837.1 3443.73,2841.65 3455.83,2841.65 3458.45,2844.27 3458.45,2855.8 3453.65,2860.6 3440.71,2860.6 3434.68,2866.63 3418.55,2866.63
VCC+3.3V on Bottom Layer "Top Layer-No Net" (solid, pour order 4): 3352.35,2919.16 3345.7,2919.17 3341.58,2915.05 3341.58,2901.17 3343.76,2898.99 3377.5,2898.99 3380,2901.49 3380,2935.19 3359.58,2935.19 3359.58,2934.2 3359.58,2924.79 3353.95,2919.16
GND on Bottom Layer "Top Layer-No Net" (solid, remove dead copper, pour order 6): 1620.84,3518.67 1554.88,3452.71 1554.88,2387.55 1690.08,2252.35 3907.81,2252.35 4105.68,2450.22 4105.68,3393.37 3978.72,3520.33 1625.78,3520.33
GND on Top Layer "Top Layer-No Net" (solid, remove dead copper, pour order 8): 1620.84,3518.67 1554.88,3452.71 1554.88,2387.55 1690.08,2252.35 3907.81,2252.35 4105.68,2450.22 4105.68,3393.37 3978.72,3520.33 1625.78,3520.33

## Keep-outs
Keep-Out Layer:
  the board outline again, w3